# Altium PCB I3_PFE_FULLFILL_SATTLER_WEIGHT.PCBDOC
Units mm, origin at the board's own origin, x right, y up, seen from the top; angles counter-clockwise.
Board outline 91.1 x 46.5 mm, 2 copper layers (TopLayer, BottomLayer); 21 components, 20 nets, 108 pads, 28 vias.
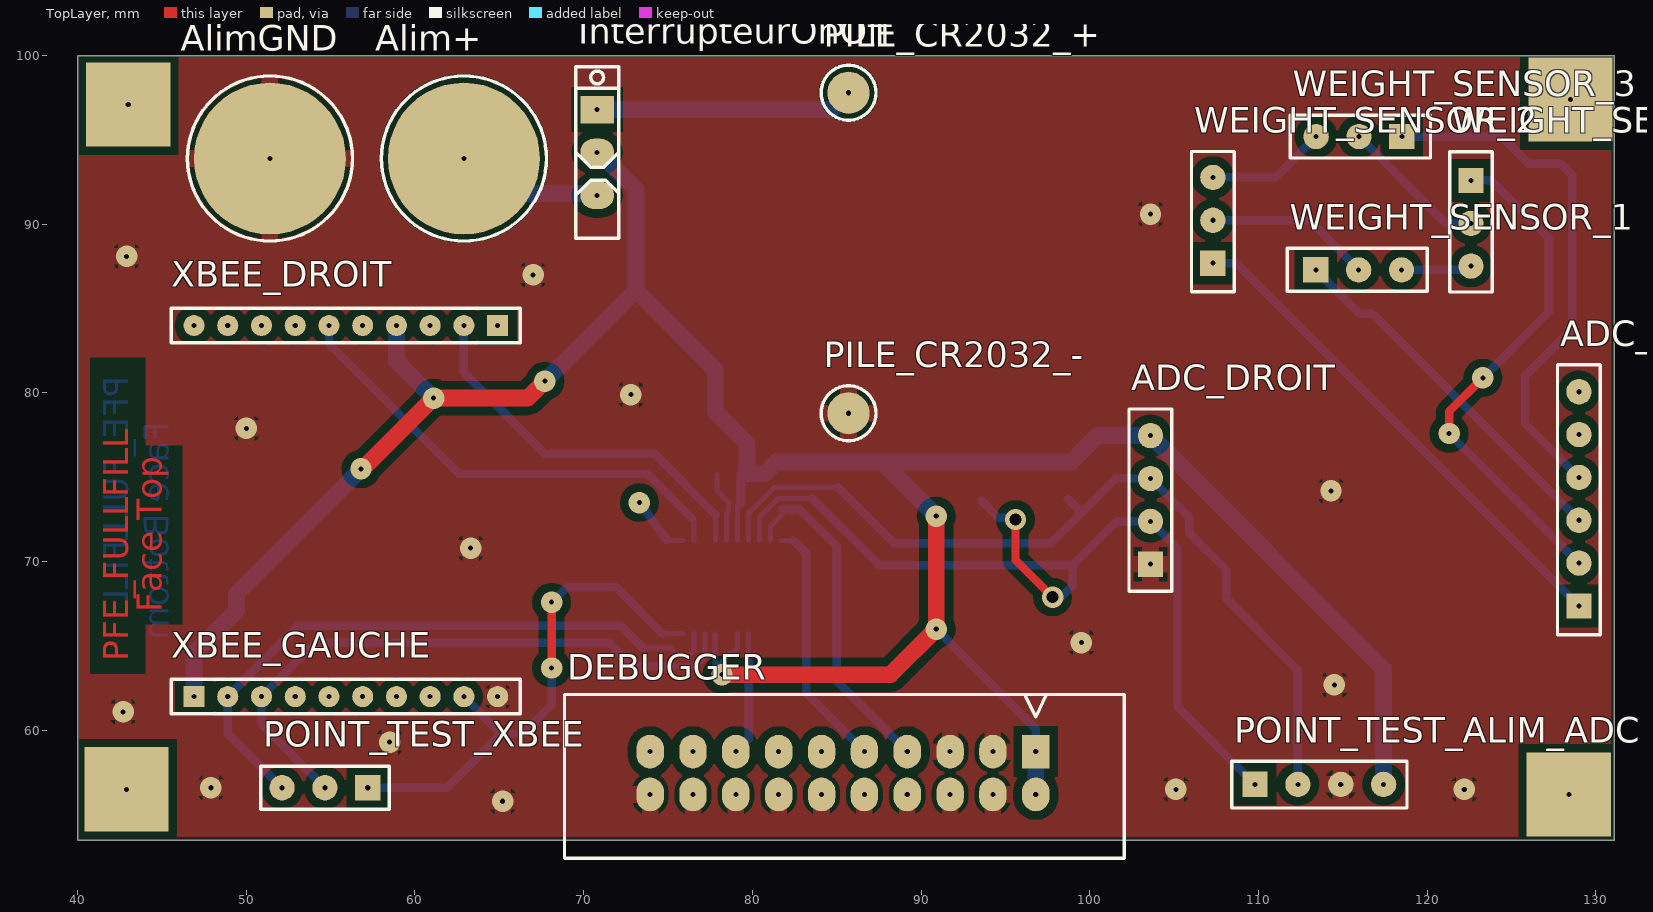
[diagram p0: TopLayer view]
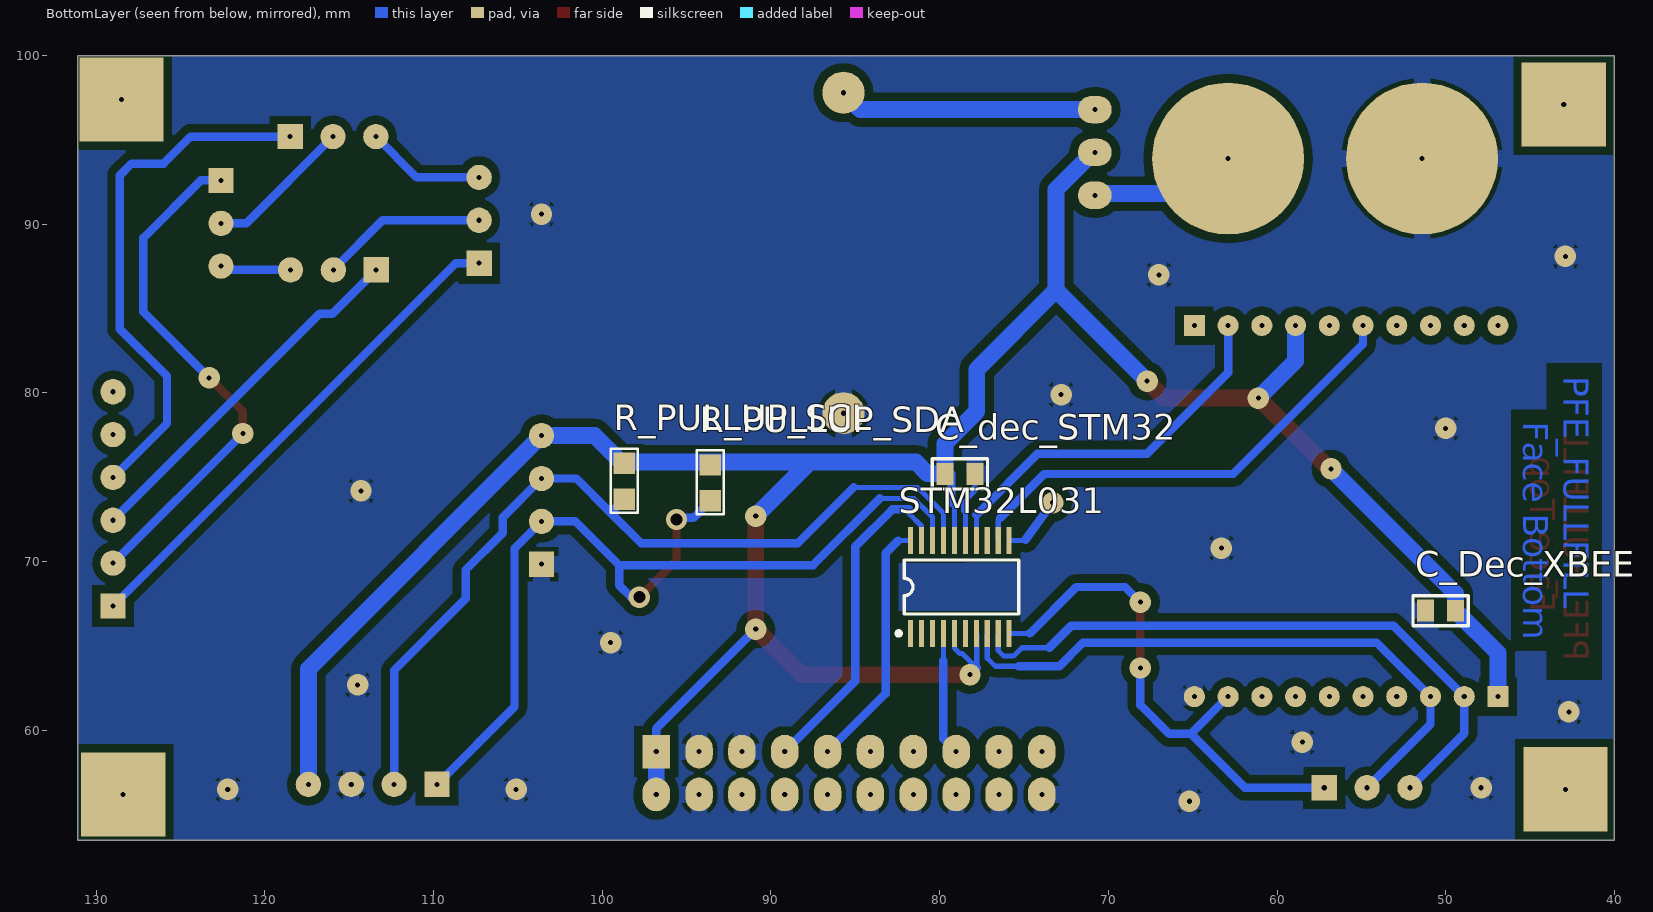
[diagram p1: BottomLayer view, seen from below]
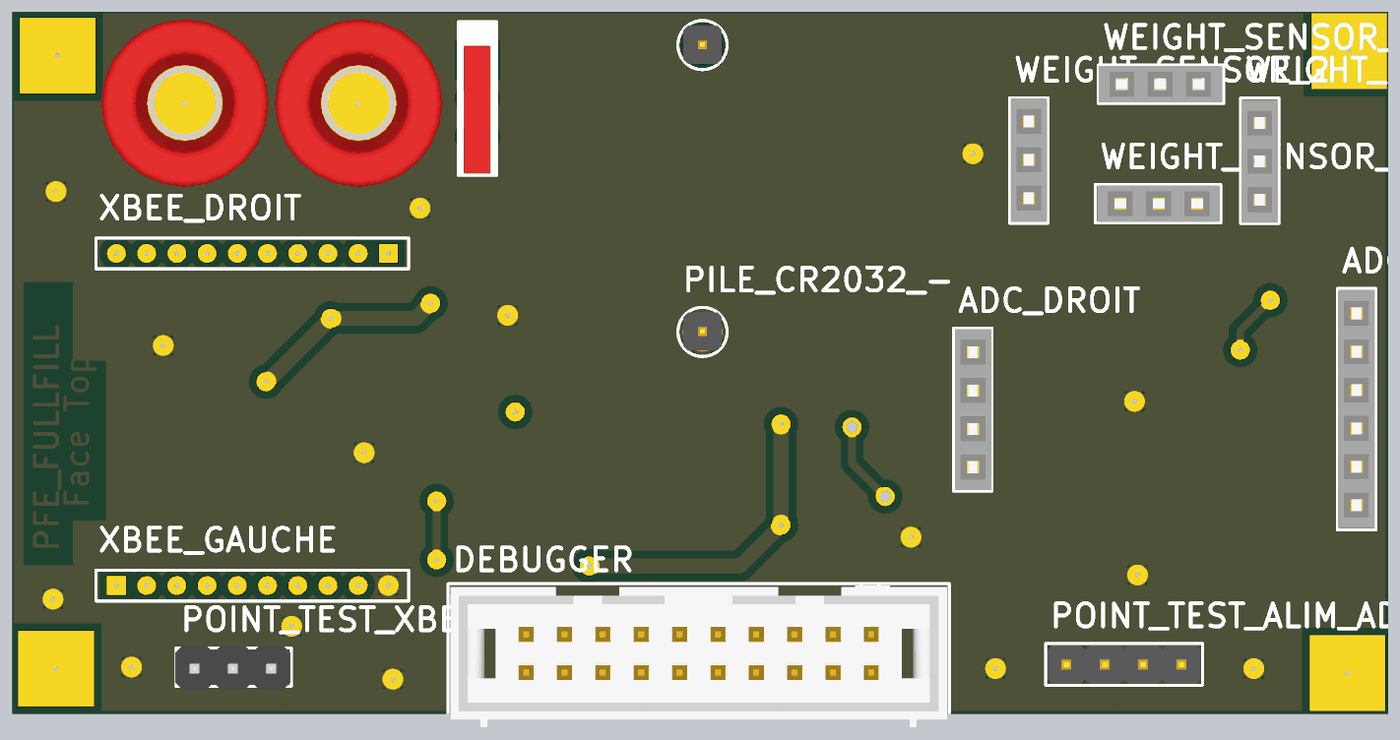
[diagram p2: 3D render of the assembled board from above, using the file's embedded part models]
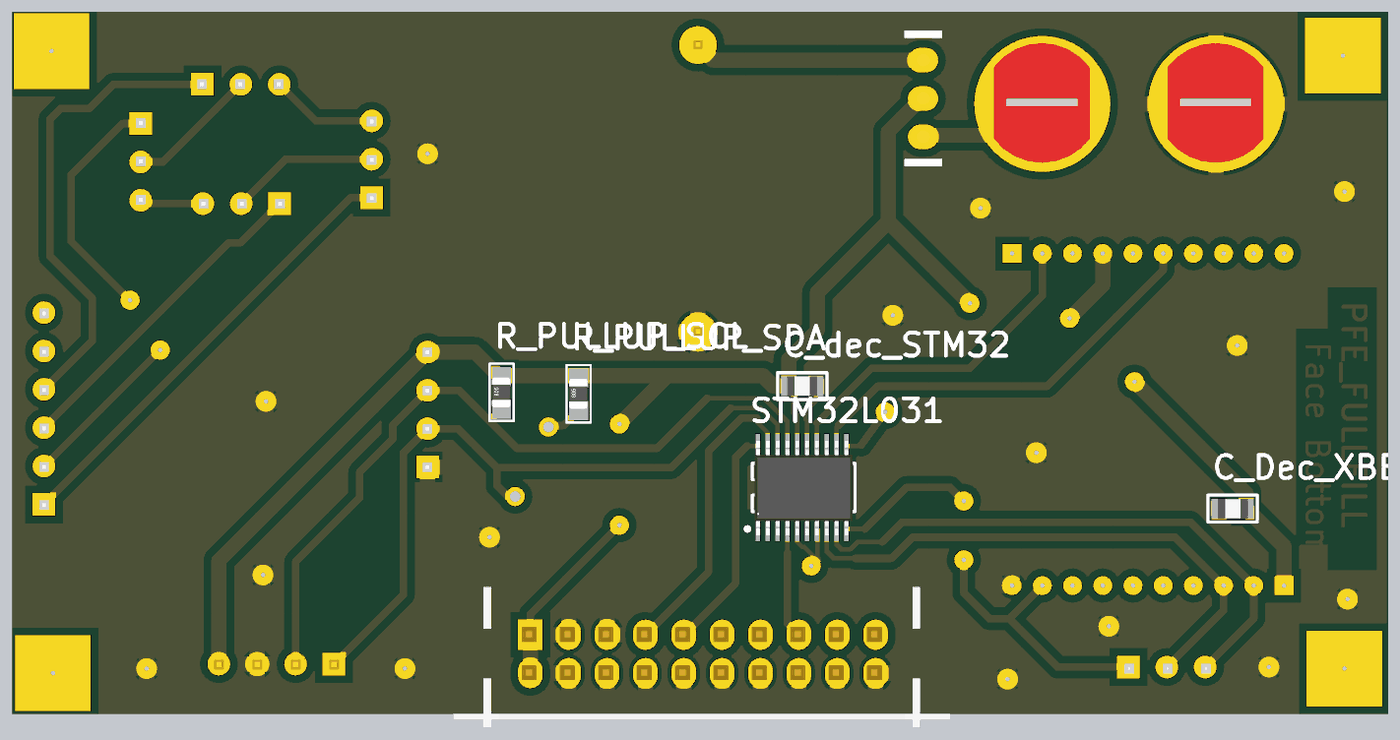
[diagram p3: 3D render of the assembled board from below, using the file's embedded part models]

## Layer stack, top to bottom
TopSolder: solder mask 0.0102, Solder Resist, Dk 3.5
TopLayer: signal copper 0.0356
Dielectric1: core 0.32, FR-4, Dk 4.8
BottomLayer: signal copper 0.0356
BottomSolder: solder mask 0.0102, Solder Resist, Dk 3.5

## Board outline
40,53.5 40,100 131.1,100 131.1,53.5

## Design rules (kind name [scope] priority, off if disabled: settings)
Clearance Clearance_7 [InNamedPolygon('GND-Top')] p1: gap=0.5
Clearance Clearance_6 [InNamedPolygon('GND-Bottom')] p2: gap=0.5
Clearance Clearance_5 [InNamedPolygon('GND-Bottom')] p3: gap=0.5
Clearance Clearance_4 [InNamedPolygon('topGND')] p4 off: gap=0.5
Clearance Clearance_3 [InNamedPolygon('BottomGND')] p5 off: gap=0.5
Clearance Clearance_2 [InNamedPolygon('BottomGND')] p6 off: gap=0.5
Clearance Clearance_1 [InNamedPolygon('BottomGND')] p7 off: gap=0
Clearance [All] p8: gap=0.25
FabricationTestPointUsage TestPointUsage [All] p1: valid=0 allowmultiple=FALSE
FabricationTestpoint Testpoint [All] p1: side=3 testpointundercomponent=TRUE minsize=1.016 maxsize=2.54 preferedsize=1.524 minholesize=0.508 maxholesize=1.016 preferedholesize=0.813 testpointgrid=0.025 allowsidetop=TRUE allowsidebottom=TRUE usegrid=TRUE gridtolerance=0
PlaneConnect [All] p1: planeconnectstyle=Relief reliefexpansion=0.5 reliefentries=4 reliefconductorwidth=1.016 reliefairgap=0.5
PolygonConnect [All] p1: connectstyle=Relief reliefconductorwidth=1.016 reliefentries=4 polygonreliefangle="90 Angle" airgapwidth=0.254
RoutingVias [All] p1: holewidth=0.6 width=1.524 viastyle="Through Hole" minholewidth=0.6 minwidth=1.524 maxholewidth=0.6 maxwidth=1.524
ShortCircuit [All] p1: allowed=TRUE
SilkToSolderMaskClearance SilkscreenOverComponentPads [IsPad] p1: minsilkscreentomaskgap=0.254 clearancetoexposedcopper=TRUE
SolderMaskExpansion [All] p1: expansion=0.051
Width Width_Power [(InNet('GND') OR InNet('+5V')  OR InNet('+3V3') OR InNet('VCC'))] p1: maxlimit=3 minlimit=0.3 preferedwidth=1.5
Width [All] p2: maxlimit=3 minlimit=0.03 preferedwidth=0.5
24 further rules are at their usual default settings.

## Components (designator, comment, footprint, x,y, rotation, side; value= is the part's Value field where it differs from the comment)
ADC_DROIT "BARRETTE_4 CONTACTS_1 RANGEE_FEMELLE_DROITE" BARRETTE_4_F_D 103.6,69.85 r90 top
ADC_GAUCHE "BARRETTE_6 CONTACTS_1 RANGEE_FEMELLE_DROITE" BARRETTE_6_F_D 129,67.375 r90 top
Alim+ "DOUILLE BANANE 4mm" DOUILLE_BANANE_4mm 62.9,93.9 r90 top
AlimGND "DOUILLE BANANE 4mm" DOUILLE_BANANE_4mm 51.4,93.9 r90 top
C_dec_STM32 "CMS_0805" CONDENSATEUR_CMS_0805 77.9,75.2 r0 bottom
C_Dec_XBEE "CMS_0805" CONDENSATEUR_CMS_0805 51.2,67.1 r180 bottom
DEBUGGER "HE10/20_MALE_DROIT_BAS_PROFIL" HE10/20_M_D_BP 96.8,56.2 r180 top
InterrupteurOnOff "INTERRUPTEUR_UNIPOLAIRE_DROIT_GLISSIERE" INTER_UNIPOL_DROIT_GLISS 70.8,96.8 r270 top
PILE_CR2032_+ "POINT_TEST" POINT_TEST 85.7,97.8 r90 top
PILE_CR2032_- "POINT_TEST" POINT_TEST 85.7,78.8 r90 top
POINT_TEST_ALIM_ADC "BARRETTE_4 CONTACTS_1 RANGEE_MALE_DROITE" BARRETTE_4_M_D 109.8,56.8 r0 top
POINT_TEST_XBEE "BARRETTE 3 CONTACTS 1 RANGEE MALE DROITE" BARRETTE_3_M_D 57.2,56.6 r180 top
R_PULLUP_SCL "RESISTANCE_CMS_0805" RESISTANCE_CMS_0805 98.7,73.7 r90 bottom
R_PULLUP_SDA "RESISTANCE_CMS_0805" RESISTANCE_CMS_0805 93.6,73.6 r90 bottom
STM32L031 "MSP430F1121AIPW_TSSOP20" TSSOP20_PAS=0.65_LARG=6.4_LONG=6.5 78.8,68.5 r180 bottom
WEIGHT_SENSOR_1 "BARRETTE 3 CONTACTS 1 RANGEE FEMELLE DROITE" BARRETTE_3_F_D 113.4,87.3 r0 top
WEIGHT_SENSOR_2 "BARRETTE 3 CONTACTS 1 RANGEE FEMELLE DROITE" BARRETTE_3_F_D 107.3,87.7 r90 top
WEIGHT_SENSOR_3 "BARRETTE 3 CONTACTS 1 RANGEE FEMELLE DROITE" BARRETTE_3_F_D 118.5,95.2 r180 top
WEIGHT_SENSOR_4 "BARRETTE 3 CONTACTS 1 RANGEE FEMELLE DROITE" BARRETTE_3_F_D 122.6,92.6 r270 top
XBEE_DROIT "MMS-110-01-L-SV" SMTC-MMS-110-01-X-SV 64.9,84 r180 top
XBEE_GAUCHE "MMS-110-01-L-SV" SMTC-MMS-110-01-X-SV 46.9,62 r0 top

## Footprints (in the part's own frame and the unit in brackets; to place one, negate y for a bottom-side part, rotate by r counter-clockwise, add the part's x,y. Pads: shape width x height; smd on the part's side, far side on the other; paste and mask are expansions set on the pad)
BARRETTE_3_F_D [mm] "BARRETTE 3 CONTACTS ; 1 RANGEE ; DROITE ; FEMELLE ; ESPACEMENT BROCHES = 2.54 mm"
  rect 1.5x1.5 hole 0.3: 1(0,0)
  round 1.5 hole 0.3: 2(2.54,0) 3(5.08,0)
  silkscreen extent -1.7,-1.27 6.61,1.27, body extent -1.56,-1.21 6.56,1.2, height 8.5
BARRETTE_3_M_D [mm] "BARRETTE 3 CONTACTS ; 1 RANGEE ; DROITE ; MALE ; ESPACEMENT BROCHES = 2.54 mm"
  rect 1.5x1.5 hole 0.3: 1(0,0)
  round 1.5 hole 0.3: 2(2.54,0) 3(5.08,0)
  silkscreen extent -1.27,-1.27 6.35,1.27, body extent -1.21,-1.42 6.41,1.5, height 8.61
BARRETTE_4_F_D [mm] "BARRETTE 4 CONTACTS ; 1 RANGEE ; DROITE ; FEMELLE ; ESPACEMENT BROCHES = 2.54 mm"
  rect 1.5x1.5 hole 0.3: 1(0,0)
  round 1.5 hole 0.3: 2(2.54,0) 3(5.08,0) 4(7.62,0)
  silkscreen extent -1.6,-1.27 9.2,1.27, body extent -1.53,-1.21 9.13,1.2, height 8.5
BARRETTE_4_M_D [mm] "BARRETTE 4 CONTACTS ; 1 RANGEE ; DROIT ; MALE ; ESPACEMENT BROCHES = 2.54 mm"
  rect 1.5x1.5 hole 0.3: 1(0,0)
  round 1.5 hole 0.3: 2(2.54,0) 3(5.08,0) 4(7.62,0)
  silkscreen extent -1.38,-1.4 9.01,1.36, body extent -1.28,-1.3 8.88,1.24, height 10.1
BARRETTE_6_F_D [mm] "BARRETTE 6 CONTACTS ; 1 RANGEE ; DROITE ; FEMELLE ; ESPACEMENT BROCHES = 2.54 mm"
  rect 1.5x1.5 hole 0.3: 1(0,0)
  round 1.5 hole 0.3: 2(2.54,0) 3(5.08,0) 4(7.62,0) 5(10.16,0) 6(12.7,0)
  silkscreen extent -1.7,-1.27 14.3,1.27, body extent -1.57,-1.2 14.17,1.21, height 8.5
CONDENSATEUR_CMS_0805 [mm] "CONDENSATEUR CMS 0805 ; DIMENSIONS : 2mm x 1.25mm"
  rect 1x1.3 smd: 1(0,0) 2(1.79,-0.01)
  silkscreen extent -0.74,-0.9 2.53,0.89, body extent -0.09,-0.67 1.91,0.64, height 0.73
DOUILLE_BANANE_4mm [mm] "DOUILLE BANANE ; DIAMETRE PASSAGE CONTACT = 4 mm ; DIAMETRE PERCAGE = 6 mm"
  round 9 hole 0.3: 1(0,0)
  silkscreen extent -4.89,-4.89 4.89,4.89, body extent -5.5,-5.6 5.63,5.53, height 4.79
HE10/20_M_D_BP [mm] "HE10 ; 20 CONTACTS ; MALE ; DROIT; BAS PROFIL ; ESPACEMENTS BROCHES = 2.54 mm"
  rect 1.63x2 hole 0.3: 1(0,-2.54)
  oval 1.63x2 hole 0.3: 2(0,0) 3(2.54,-2.54) 4(2.54,0) 5(5.08,-2.54) 6(5.08,0) 7(7.62,-2.54) 8(7.62,0) 9(10.16,-2.54) 10(10.16,0) 11(12.7,-2.54) 12(12.7,0) 13(15.24,-2.54) 14(15.24,0) 15(17.78,-2.54) 16(17.78,0) 17(20.32,-2.54) 18(20.32,0) 19(22.86,-2.54) 20(22.86,0)
  silkscreen extent -5.24,-5.93 27.94,3.77, body extent -5.1,-5.8 27.8,3.6, height 8.8
INTER_UNIPOL_DROIT_GLISS [mil] "Switch; Slide; SPDT; Pin Spacing=2.54mm"
  rect 64x79 / inner oval 64x79 / far side oval 64x79 hole 11.81: 1(0,0)
  oval 64x79 hole 11.81: 2(100,0) 3(200,0)
  silkscreen extent -100,-50 300,50, body extent -97,-50 297,48, height 291
POINT_TEST [mm] "PASTILLE TRAVERSANTE ; DIAMETRE = 2.5 mm ; DIAMETRE PERCAGE = 1.3 mm"
  round 2.5 hole 0.3: 1(0,0)
  silkscreen extent -1.62,-1.63 1.62,1.63, body extent -1.24,-1.27 1.3,1.27, height 5.94
RESISTANCE_CMS_0805 [mil] "RESISTANCE CMS 0805 ; DIMENSIONS : 2mm x 1.25mm"
  rect 50x50 smd: 1(0,0) 2(84,0)
  silkscreen extent -31,-31 118,31, body extent 4,-24 83,26, height 31
SMTC-MMS-110-01-X-SV [mm] "Through Hole Box Connector Strip Assembly, 1x10 Pins, Vertical, 2mm Pitch, Female"
  rect 1.25x1.25 hole 0.3: 1(0,0)
  round 1.25 hole 0.3: 2(2,0) 3(4,0) 4(6,0) 5(8,0) 6(10,0) 7(12,0) 8(14,0) 9(16,0) 10(18,0)
  silkscreen extent -1.35,-1.02 19.35,1.02, body extent -1.28,-1 19.28,1, height 4.44
TSSOP20_PAS=0.65_LARG=6.4_LONG=6.5 [mm] "Thin Shrink Small Outline Plastic Packages ; 20 Leads ; Body Width = 4.4 mm ; Pitch = 0.65 mm"
  rect 0.3x1.6 smd: 1(-2.925,-2.75) 2(-2.275,-2.75) 3(-1.625,-2.75) 4(-0.975,-2.75) 5(-0.325,-2.75) 6(0.325,-2.75) 7(0.975,-2.75) 8(1.625,-2.75) 9(2.275,-2.75) 10(2.925,-2.75) 11(2.925,2.75) 12(2.275,2.75) 13(1.625,2.75) 14(0.975,2.75) 15(0.325,2.75) 16(-0.325,2.75) 17(-0.975,2.75) 18(-1.625,2.75) 19(-2.275,2.75) 20(-2.925,2.75)
  silkscreen extent -3.75,-2.87 3.5,1.6, body extent -3.15,-3.18 3.35,3.1, height 1.09

## Part data
ADC_DROIT: "BARRETTE 4 CONTACTS 1 RANGEE FEMELLE DROITE"
ADC_GAUCHE: "BARRETTE 6 CONTACTS 1 RANGEE FEMELLE DROITE"
Alim+ AlimGND: library part DOUILLE_BANANE_4mm, "DOUILLE BANANE 4 mm"
C_dec_STM32 C_Dec_XBEE: library part CONDENSATEUR_CMS_CER_0805, "CONDENSATEUR CMS CERAMIQUE 0805"
DEBUGGER: "EMBASE HE10/20 MALE DROIT BAS PROFIL"
InterrupteurOnOff: "INTERRUPTEUR UNIPOLAIRE DROIT A GLISSIERE"
PILE_CR2032_+ PILE_CR2032_-: "POINT TEST"
POINT_TEST_ALIM_ADC: "BARRETTE 4 CONTACTS 1 RANGEE MALE DROITE"
POINT_TEST_XBEE: library part "BARRETTE_3 CONTACTS_1 RANGEE_MALE_DROITE"
R_PULLUP_SCL R_PULLUP_SDA: "RESISTANCE CMS 0805"
STM32L031: "MICROCONTROLEUR FLASH - 16BITS - TSSOP20"
WEIGHT_SENSOR_1 WEIGHT_SENSOR_2 WEIGHT_SENSOR_3 WEIGHT_SENSOR_4: library part "BARRETTE_3 CONTACTS_1 RANGEE_FEMELLE_DROITE"
XBEE_DROIT XBEE_GAUCHE: "Tiger Claw(TM) Socket Strip, Through-hole, Vertical, -55 to 125 degC, 2 mm Pitch, 10-Pin, Female, RoHS"

## Free pads (board coordinates)
  rect 5x5 hole 0.3: 1(43,97.1) 2(42.9,56.5) 3(128.4,56.2) 4(128.5,97.4)

## Via types
v1: diameter 1.27, hole 0.3, TopLayer to BottomLayer, 26 vias
v2: diameter 1.27, hole 0.711, TopLayer to BottomLayer, 2 vias

## Nets (pads, with @x,y where several pads share a name; then routed paths per layer and width w, separated by ;. In a path a pad name is that pad's centre, name@x,y a point inside that pad or via, vN(x,y) a via of type N, cw(c..) or ccw(c..) an arc to the next point about the centre after c; other vN are vias at no path point)
3V: ADC_DROIT.4 C_dec_STM32.2 C_Dec_XBEE.2 DEBUGGER.1 DEBUGGER.2 InterrupteurOnOff.2 POINT_TEST_ALIM_ADC.4 R_PULLUP_SCL.2 R_PULLUP_SDA.2 STM32L031.5 STM32L031.7 STM32L031.16 XBEE_DROIT.4 XBEE_GAUCHE.1 | length 164.3
  TopLayer w1: v1@56.9,75.5 v1(61.1,79.7) 66.7,79.7 v1(67.7,80.7) ; v1(78.2,63.3) 88.2,63.3 v1(90.9,66) v1(90.9,72.7)
  BottomLayer w0.3: STM32L031.7@77.8,65.725 77.8,63.7 78.65,64.55 78.791,64.55 79.125,64.884 STM32L031.5 ; STM32L031.16 79.125,73.325 79.3,73.5
  BottomLayer w0.5: v1@77.8,63.7 v1(78.2,63.3) ; 79.3,73.5 C_dec_STM32.2@79.3,75.21 ; C_dec_STM32.2@79.5,75.02 C_dec_STM32.2 ; v1(90.9,66) 96.8,60.1 DEBUGGER.1
  BottomLayer w1: XBEE_GAUCHE.1 46.9,64.58 C_Dec_XBEE.2 49.41,68.11 v1(56.8,75.5) ; XBEE_DROIT.4 58.9,81.9 v1(61.1,79.7) ; v1(67.7,80.7) 70.7,83.7 73.1,86.1 ; InterrupteurOnOff.2 70.9,94.26 73.1,92.06 73.1,86.1 ; v1(90.9,72.7) 87.7,75.9 ; DEBUGGER.2 DEBUGGER.1 ; POINT_TEST_ALIM_ADC.4 117.42,63.65 ADC_DROIT.4 100.47,77.47 98.9,75.9 87.7,75.9 ; 73.1,86.1 77.8,81.4 77.8,78.9 79.69,77.01 C_dec_STM32.2 80.71,75.21 81.4,75.9 87.7,75.9
A+: ADC_GAUCHE.4 WEIGHT_SENSOR_3.1 | length 31.4
  BottomLayer w0.5: WEIGHT_SENSOR_3.1 124.4,95.2 126,93.6 127.9,93.6 128.6,92.9 128.6,83.8 125.8,81 125.8,78.195 ADC_GAUCHE.4
A-: ADC_GAUCHE.3 WEIGHT_SENSOR_1.1 | length 21.7
  BottomLayer w0.5: WEIGHT_SENSOR_1.1 116,84.7 116.755,84.7 ADC_GAUCHE.3
E+: ADC_GAUCHE.1 WEIGHT_SENSOR_2.1 | length 30.1
  BottomLayer w0.5: WEIGHT_SENSOR_2.1 108.675,87.7 ADC_GAUCHE.1
E-: ADC_GAUCHE.2 WEIGHT_SENSOR_4.1 | length 31
  TopLayer w0.5: v1(121.3,77.6) 121.3,78.9 v1(123.3,80.9) v1@123.3,80.785
  BottomLayer w0.5: v1(121.3,77.6) ADC_GAUCHE.2@128.985,69.915 ; WEIGHT_SENSOR_4.1 123.8,92.6 127.2,89.2 127.2,84.8 v1(123.3,80.9)
GND: ADC_DROIT.1 AlimGND.1 C_dec_STM32.1 C_Dec_XBEE.1 DEBUGGER.3 DEBUGGER.4 DEBUGGER.5 DEBUGGER.6 DEBUGGER.8 DEBUGGER.10 DEBUGGER.12 DEBUGGER.14 DEBUGGER.16 DEBUGGER.18 DEBUGGER.20 PILE_CR2032_-.1 POINT_TEST_ALIM_ADC.3 STM32L031.15 XBEE_GAUCHE.10 | length 4.3
  BottomLayer w0.3: C_dec_STM32.1 77.9,74.2 78.575,73.525 78.575,72.994 78.475,72.894 STM32L031.15
  other v1: 65.2,55.8 105.1,56.5 122.2,56.5 47.9,56.6 58.5,59.3 42.7,61.1 114.5,62.7 99.5,65.2 63.3,70.8 114.3,74.2 50,77.9 72.8,79.9 67,87 42.9,88.1 103.6,90.6
I2C_ADC_SCL: ADC_DROIT.3 POINT_TEST_ALIM_ADC.2 R_PULLUP_SCL.1 STM32L031.17 | length 51.9
  BottomLayer w0.3: STM32L031.17 79.775,72.875 81.3,74.4 85.1,74.4
  BottomLayer w0.5: 85.1,74.4 88.4,71.1 97.7,71.1 99.5,72.9 ; R_PULLUP_SCL.1 99.5,72.9 ; POINT_TEST_ALIM_ADC.2 112.34,63.56 108.1,67.8 108.1,69.5 105.9,71.7 105.9,72.63 ADC_DROIT.3 101.53,74.93 99.5,72.9
I2C_ADC_SDA: ADC_DROIT.2 POINT_TEST_ALIM_ADC.1 R_PULLUP_SDA.1 STM32L031.18 | length 56.8
  TopLayer w0.5: v2(95.6,72.5) 95.6,70.1 v2(97.8,67.9)
  BottomLayer w0.3: STM32L031.18 80.425,72.644 81.531,73.75 83.55,73.75
  BottomLayer w0.5: 83.55,73.75 87.5,69.8 99,69.8 ; R_PULLUP_SDA.1 94.6,72.6 v2@95.9,72.6 ; v2(97.8,67.9) 98.3,67.9 99,68.6 99,69.8 ; POINT_TEST_ALIM_ADC.1 105.2,61.4 105.2,70.79 ADC_DROIT.2 101.59,72.39 99,69.8
NetAlim+_1: Alim+.1 InterrupteurOnOff.3 | length 8.3
  BottomLayer w1: Alim+.1 64.98,91.82 InterrupteurOnOff.3@70.3,91.82
NetInterrupteurOnOff_1: InterrupteurOnOff.1 PILE_CR2032_+.1 | length 15.2
  BottomLayer w1: InterrupteurOnOff.1 84.7,96.8 ; 84.8,96.9 PILE_CR2032_+.1
NetWEIGHT_SENSOR_1_2: WEIGHT_SENSOR_1.2 WEIGHT_SENSOR_2.2 | length 9.9
  BottomLayer w0.5: WEIGHT_SENSOR_2.2 113.021,90.24 115.94,87.321 WEIGHT_SENSOR_1.2
NetWEIGHT_SENSOR_1_3: WEIGHT_SENSOR_1.3 WEIGHT_SENSOR_4.3 | length 4.2
  BottomLayer w0.5: WEIGHT_SENSOR_1.3 122.38,87.3 WEIGHT_SENSOR_4.3
NetWEIGHT_SENSOR_2_3: WEIGHT_SENSOR_2.3 WEIGHT_SENSOR_3.3 | length 7.1
  BottomLayer w0.5: WEIGHT_SENSOR_2.3 111,92.78 WEIGHT_SENSOR_3.3
NetWEIGHT_SENSOR_3_2: WEIGHT_SENSOR_3.2 WEIGHT_SENSOR_4.2 | length 8.8
  BottomLayer w0.5: WEIGHT_SENSOR_3.2@115.96,95.221 WEIGHT_SENSOR_3.2 121.1,90.06 WEIGHT_SENSOR_4.2
RESET: DEBUGGER.15 STM32L031.4 | length 7.3
  BottomLayer w0.3: 79.775,64.125 STM32L031.4
  BottomLayer w0.5: DEBUGGER.15 79.775,59.495 79.775,64.125
SWCLK: DEBUGGER.9 STM32L031.20 | length 15
  BottomLayer w0.3: STM32L031.20 82.45,71.25
  BottomLayer w0.5: 82.45,71.25 83.2,70.5 83.2,62.18 DEBUGGER.9
SWDIO: DEBUGGER.7 STM32L031.19 | length 20.2
  BottomLayer w0.3: STM32L031.19 81.075,72.116 81.8,72.841 81.8,73.1
  BottomLayer w0.5: 81.8,73.1 82.8,73.1 85,70.9 85,62.92 DEBUGGER.7
UART_XBEE_RX: POINT_TEST_XBEE.2 STM32L031.8 XBEE_GAUCHE.3 | length 36.8
  BottomLayer w0.3: 75.3,63.8 76.7,63.8 77.175,64.275 STM32L031.8
  BottomLayer w0.5: POINT_TEST_XBEE.2 50.9,60.36 XBEE_GAUCHE.3 54.1,65.2 71.5,65.2 72.9,63.8 75.3,63.8
UART_XBEE_TX: POINT_TEST_XBEE.3 STM32L031.9 XBEE_GAUCHE.2 | length 37.9
  BottomLayer w0.3: 73.5,64.9 75.119,64.9 75.619,64.4 76.2,64.4 76.525,64.725 ; 76.525,64.784 STM32L031.9
  BottomLayer w0.5: POINT_TEST_XBEE.3 48.9,59.82 XBEE_GAUCHE.2 53.1,66.2 72.2,66.2 73.5,64.9
XBEE_SLEEP_RQ: POINT_TEST_XBEE.1 STM32L031.10 XBEE_GAUCHE.9 | length 31.4
  TopLayer w0.5: v1(68.1,63.7) v1(68.1,67.6)
  BottomLayer w0.3: 74.65,65.75 STM32L031.10
  BottomLayer w0.5: POINT_TEST_XBEE.1 61.9,56.6 65.1,59.8 ; XBEE_GAUCHE.9 65.1,59.8 ; v1(68.1,63.7) 68.1,61.5 66.4,59.8 65.1,59.8 ; v1(68.1,67.6) 69,68.5 71.9,68.5 74.65,65.75
pads on no net: ADC_GAUCHE.5 ADC_GAUCHE.6 DEBUGGER.11 DEBUGGER.13 DEBUGGER.17 DEBUGGER.19 STM32L031.1 STM32L031.2 STM32L031.3 STM32L031.6 STM32L031.11 STM32L031.12 STM32L031.13 STM32L031.14 XBEE_DROIT.1 XBEE_DROIT.2 XBEE_DROIT.3 XBEE_DROIT.5 XBEE_DROIT.6 XBEE_DROIT.7 XBEE_DROIT.8 XBEE_DROIT.9 XBEE_DROIT.10 XBEE_GAUCHE.4 XBEE_GAUCHE.5 XBEE_GAUCHE.6 XBEE_GAUCHE.7 XBEE_GAUCHE.8
copper on no net: | length 54.7
  BottomLayer w0.3: 74.9,71.3 74.95,71.25 75.875,71.25 ; 76.4,72.6 76.525,72.475 76.525,71.25 ; 77.825,71.25 77.825,72.775
  BottomLayer w0.5: 54.9,84 54.9,82.9 62.6,75.2 73.8,75.2 76.4,72.6 ; 62.9,84 62.9,81.2 67.7,76.4 74.2,76.4 77.825,72.775 ; v1(73.3,73.5) 74.9,71.3

## Polygon pours and split planes (outlines as drawn)
GND on TopLayer "GND-Top" (solid, remove dead copper, pour order 4): 40.3,99.9 130.8,99.9 130.9,100 130.9,53.7 40.3,53.7 40.2,53.8 40.1,53.9 40.1,99.8
GND on BottomLayer "GND-Bottom" (solid, remove dead copper, pour order 6): 40,100 131.1,100 131.1,53.5 39.9,53.5 39.7,53.3 40.1,53.7 40.1,99.8

## Other copper
TopLayer:
  text "Face Top" at 45,67 h1.5 r90
  text "PFE_FULLFILL" at 43,64.1 h1.5 r90
BottomLayer:
  text "PFE_FULLFILL" at 43,81 h1.5 r90
  text "Face Bottom" at 45.4,78.3 h1.5 r90

## Silkscreen, mask and mechanical layers (free items; w line width, h text height)
Mechanical15:
  the board outline again, w0.254